# Altium PCB 3Phase+Driver_STUDY.PcbDoc
Units mil, origin at the board's own origin, x right, y up, seen from the top; angles counter-clockwise.
Board outline 3275 x 1235 mil, 2 copper layers (Top Layer, Bottom Layer); 85 components, 49 nets, 241 pads, 28 vias.
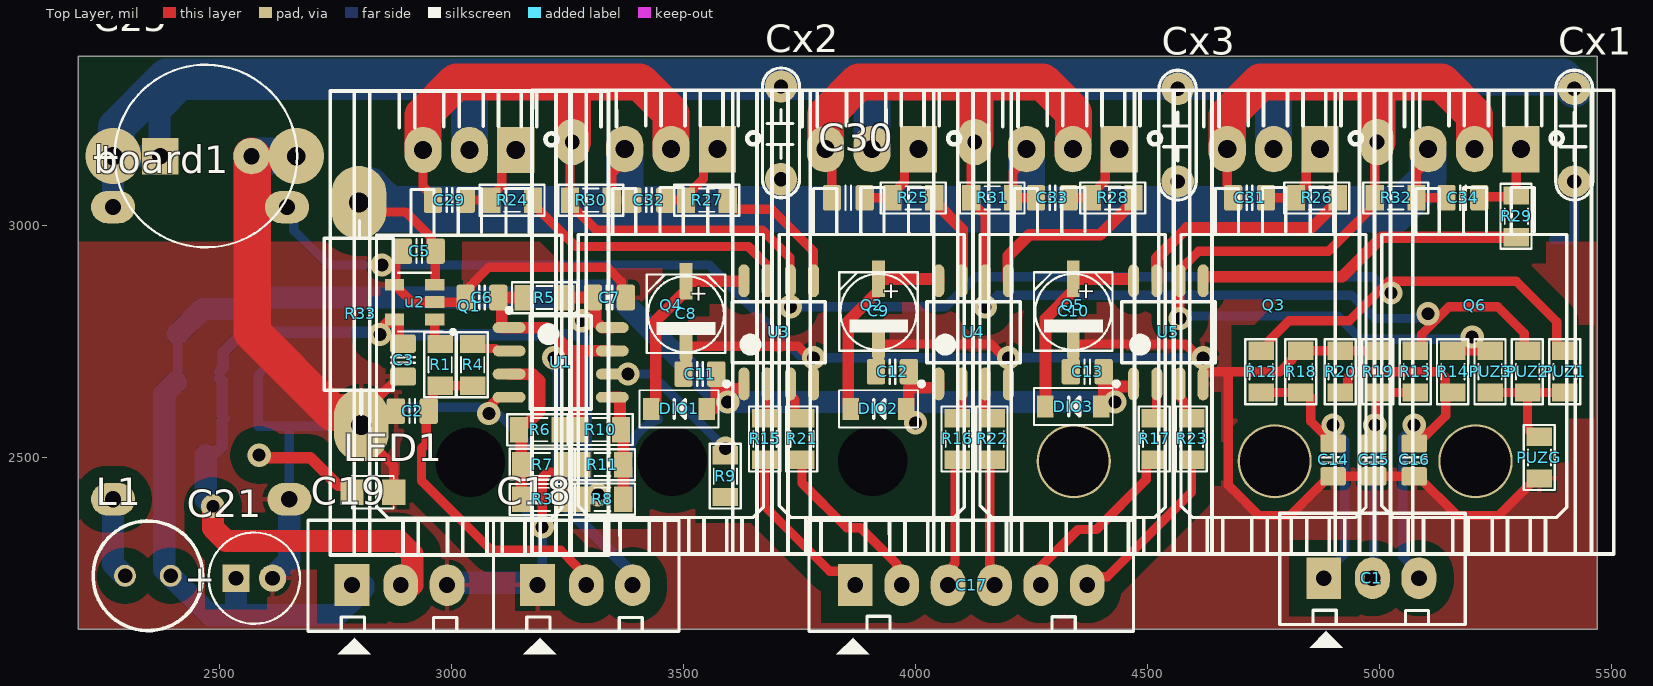
[diagram p0: Top Layer view]
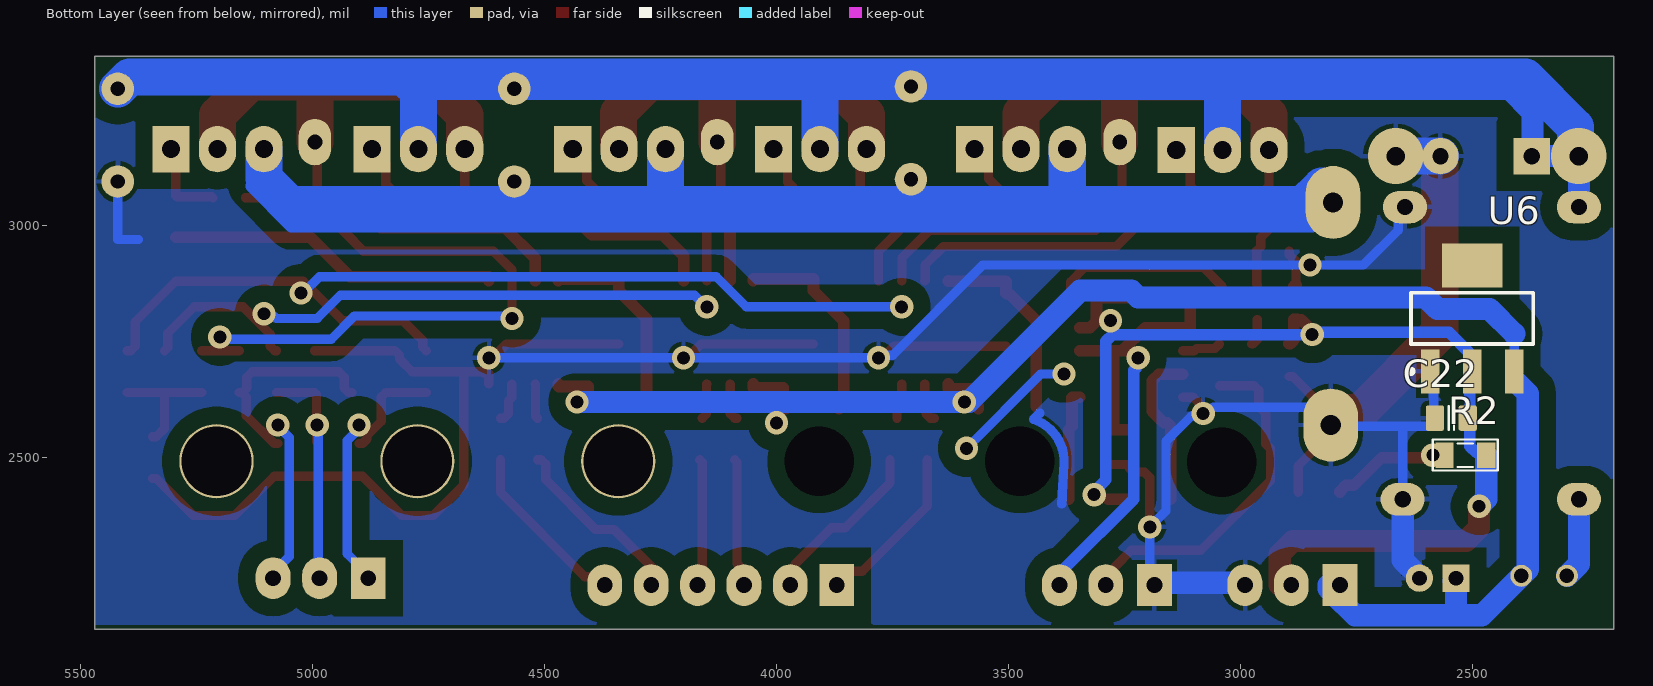
[diagram p1: Bottom Layer view, seen from below]
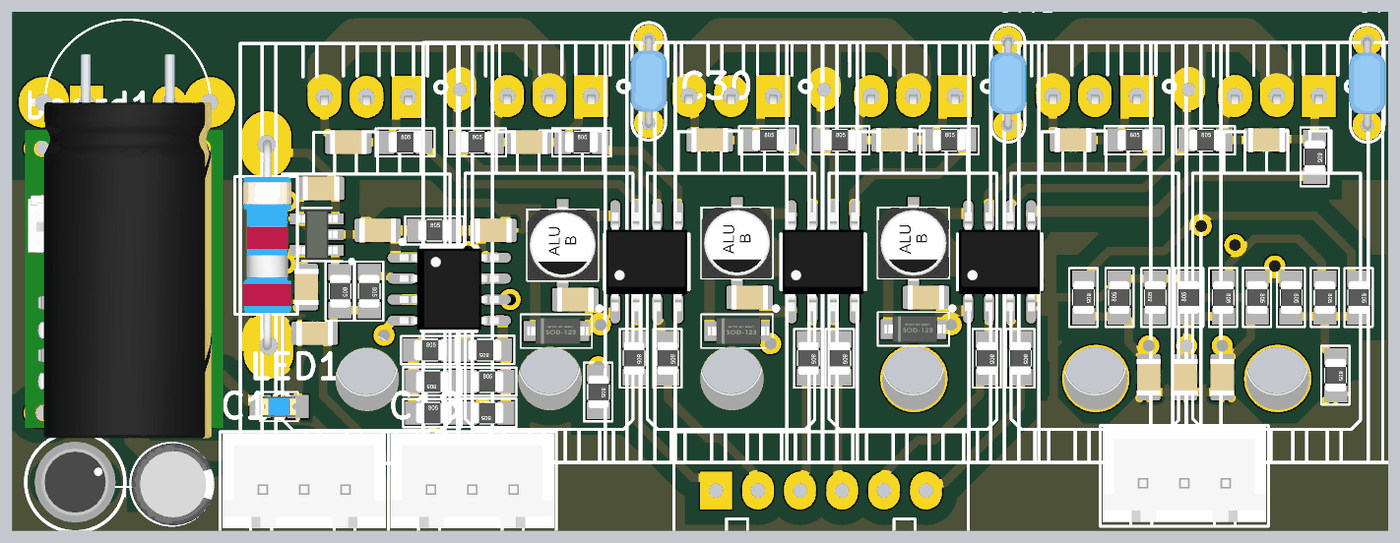
[diagram p2: 3D render of the assembled board from above, using the file's embedded part models]
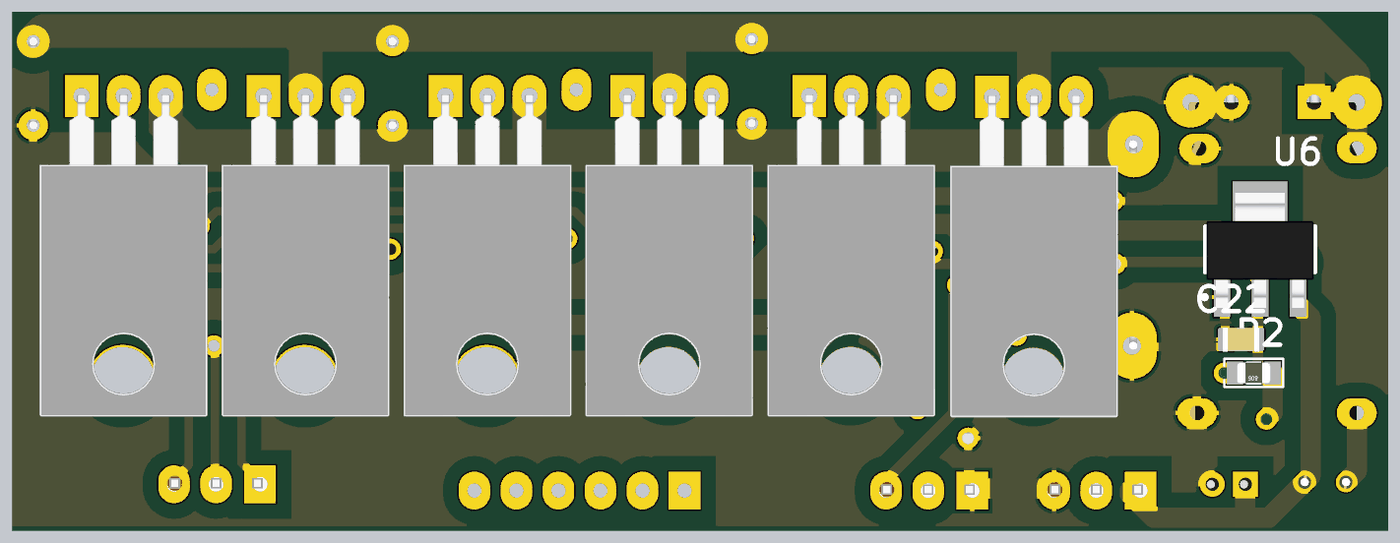
[diagram p3: 3D render of the assembled board from below, using the file's embedded part models]

## Layer stack, top to bottom
Top Solder: solder mask 0.4, Solder Resist, Dk 3.5
Top Layer: signal copper 1.4
Dielectric 1: dielectric 12.6, FR-4, Dk 4.8
Bottom Layer: signal copper 1.4
Bottom Solder: solder mask 0.4, Solder Resist, Dk 3.5

## Board outline
2195,2130 2195,3365 5470,3365 5470,2130

## Design rules (kind name [scope] priority, off if disabled: settings)
Clearance [All] p1: gap=10 ignorepadtopadclearanceinfootprint=FALSE except(0: Arc-Hole Track-Hole SMDPad-Hole THPad-Hole Via-Hole Fill-Hole Poly-Hole Region-Hole Text-Hole; 37: Arc-Fill Arc-Poly Arc-Region Track-Fill Track-Poly Track-Region SMDPad-Fill SMDPad-Poly SMDPad-Region THPad-Fill THPad-Poly THPad-Region Via-Fill Via-Poly Via-Region Fill-Fill Fill-Poly Fill-Region Poly-Poly Poly-Region Region-Region)
PolygonConnect [All] p1: connectstyle=Relief reliefconductorwidth=10 reliefentries=4 polygonreliefangle="90 Angle" airgapwidth=10
RoutingVias [All] p1: holewidth=28 width=50 viastyle="Through Hole" minholewidth=28 minwidth=50 maxholewidth=28 maxwidth=50
SolderMaskExpansion [All] p1: expansion=4 istentingtop=FALSE
Width [All] p1: maxlimit=80 minlimit=20 preferedwidth=48
30 further rules are at their usual default settings.

## Components (designator, comment, footprint, x,y, rotation, side; value= is the part's Value field where it differs from the comment)
board1 "Converter DC-DC" mini360 2225,3083 r270 top
C1 "Header3" Header3 4885,2240 r0 top
C2 "approved sub OK" CAPC2012X135N 2915,2600 r180 top value=0805
C3 "approved sub OK" CAPC2012X135N 2895,2710 r90 top value=0805
C5 "approved sub OK" CAPC2012X135N 2930,2945 r0 top value=0805
C6 "approved sub OK" CAPC2012X135N 3065,2845 r0 top value=0805
C7 "approved sub OK" CAPC2012X135N 3340,2845 r180 top value=0805
C8 "CN-ALU-SMD" CAP-ALU-SMD-5.5x5.5 3505,2810 r270 top
C9 "CN-ALU-SMD" CAP-ALU-SMD-5.5x5.5 3920,2815 r270 top
C10 "CN-ALU-SMD" CAP-ALU-SMD-5.5x5.5 4340,2815 r270 top
C11 "approved sub OK" CAPC2012X135N 3535,2680 r0 top value=0805
C12 "approved sub OK" CAPC2012X135N 3950,2685 r0 top value=0805
C13 "approved sub OK" CAPC2012X135N 4370,2685 r0 top value=0805
C14 "approved sub OK" CAPC2012X135N 4900,2495 r270 top value=0805
C15 "approved sub OK" CAPC2012X135N 4987.5,2495 r270 top value=0805
C16 "approved sub OK" CAPC2012X135N 5075,2495 r270 top value=0805
C17 "Header6" Header6 3870,2225 r0 top
C18 "Header3" Header3 3190,2225 r0 top
C19 "Header3" Header3 2790,2225 r0 top
C21 "d5" CA-ALU-5 2574.37,2240 r0 top value=104
C22 "approved sub OK" CAPC2012X135N 2545,2585 r180 bottom value=0805
C25 "CN-10" CA-ALU-10 2470,3150 r0 top value=104
C29 "approved sub OK" CAPC2012X135N 2995,3055 r180 top value=0805
C30 "approved sub OK" CAPC2012X135N 3855,3060 r180 top value=0805
C31 "approved sub OK" CAPC2012X135N 4720,3060 r180 top value=0805
C32 "approved sub OK" CAPC2012X135N 3425,3055 r180 top value=0805
C33 "approved sub OK" CAPC2012X135N 4295,3060 r180 top value=0805
C34 "approved sub OK" CAPC2012X135N 5180,3060 r180 top value=0805
Cx1 "U" CN2-LT 5415,3195 r90 top value=33pF
Cx2 "V" CN2-LT 3705,3200 r90 top value=33pF
Cx3 "W" CN2-LT 4560,3195 r90 top value=33pF
DIO1 "Diode SMD" DIO-SMD-123 3490,2605 r0 top value=1N5007
DIO2 "Diode SMD" DIO-SMD-123 3920,2605 r0 top value=1N5007
DIO3 "Diode SMD" DIO-SMD-123 4340,2610 r0 top value=1N5007
L1 "L-DIP-1" L-DIP-M-5.3 2345,2245 r0 top value="150 mH"
LED1 "bl" LED-0805-Blue 2785,2425 r0 top value="LED 3 - 5 ly 2 Colour"
PUZ1 "0805" RES-SMD-0805 5400,2685 r270 top
PUZ2 "0805" RES-SMD-0805 5319.38,2685 r270 top
PUZ3 "0805" RES-SMD-0805 5238.75,2685 r270 top
PUZG "0805" RES-SMD-0805 5345,2500 r270 top
Q1 "dow" TO220NH#1 3138,3163 r180 top locked value=IRF840
Q2 "dow" TO220NH#2 4006,3165 r180 top locked value=IRF840
Q3 "dow" TO220NH#3 4872,3165 r180 top locked value=IRF840
Q4 "dow" TO220NH#2 3573,3165 r180 top locked value=IRF840
Q5 "dow" TO220NH#3 4439,3165 r180 top locked value=IRF840
Q6 "dow" TO220NH#3 5305,3165 r180 top locked value=IRF840
R1 "10" RES-SMD-0805 2975,2700 r270 top
R2 "0805" RES-SMD-0805 2515,2505 r0 bottom
R3 "0805" RES-SMD-0805 3195,2410 r0 top
R4 "0805" RES-SMD-0805 3045,2700 r270 top
R5 "0805" RES-SMD-0805 3200,2845 r0 top
R6 "0805" RES-SMD-0805 3190,2560 r0 top
R7 "0805" RES-SMD-0805 3195,2485 r180 top
R8 "0805" RES-SMD-0805 3325,2410 r180 top
R9 "0805" RES-SMD-0805 3590,2460 r270 top
R10 "0805" RES-SMD-0805 3320,2560 r180 top
R11 "0805" RES-SMD-0805 3325,2485 r0 top
R12 "0805" RES-SMD-0805 4745,2685 r270 top
R13 "0805" RES-SMD-0805 5077.5,2685 r270 top
R14 "0805" RES-SMD-0805 5158.12,2685 r270 top
R15 "0805" RES-SMD-0805 3675,2540 r270 top
R16 "0805" RES-SMD-0805 4090,2540 r270 top
R17 "0805" RES-SMD-0805 4515,2540 r270 top
R18 "0805" RES-SMD-0805 4830,2685 r90 top
R19 "0805" RES-SMD-0805 4995.88,2685 r90 top
R20 "0805" RES-SMD-0805 4915.25,2685 r90 top
R21 "0805" RES-SMD-0805 3755,2540 r270 top
R22 "0805" RES-SMD-0805 4165,2540 r270 top
R23 "0805" RES-SMD-0805 4595,2540 r270 top
R24 "0805" RES-SMD-0805 3130,3055 r0 top
R25 "0805" RES-SMD-0805 3995,3060 r0 top
R26 "0805" RES-SMD-0805 4865,3060 r0 top
R27 "0805" RES-SMD-0805 3550,3055 r0 top
R28 "0805" RES-SMD-0805 4425,3060 r0 top
R29 "0805" RES-SMD-0805 5295,3020 r270 top
R30 "0805" RES-SMD-0805 3300,3055 r0 top
R31 "0805" RES-SMD-0805 4165,3060 r0 top
R32 "0805" RES-SMD-0805 5035,3060 r0 top
R33 "1/2" RES-1/2W 2800,2790 r90 top
U1 "LM393" SO8 3235,2705 r0 top
u2 "INA180" SOT-23-5 2920,2835 r180 top
U3 "IR2101" SO8 3705,2770 r90 top
U4 "IR2101" SO8 4125,2770 r90 top
U5 "IR2101" SO8 4545,2770 r90 top
U6 "LM1117-3.3V" SOT223 2500,2800 r180 bottom

## Footprints (in the part's own frame and the unit in brackets; to place one, negate y for a bottom-side part, rotate by r counter-clockwise, add the part's x,y. Pads: shape width x height; smd on the part's side, far side on the other; paste and mask are expansions set on the pad)
CA-ALU-5 [mm] "Polarized capacitors, Aluminum Electrolytic Capacitors, 2-Leads, Body 5x11x2x0.5"
  rect 1.5x1.5 hole 0.8: 1(-1,0)
  round 1.5 hole 0.8: 2(1,0)
  silkscreen extent -2.5,-2.5 2.5,2.5, body extent -2.41,-2.5 2.59,2.5, height 11
CA-ALU-10 [mm] "Polarized capacitors, Aluminum Electrolytic Capacitors, 2-Leads, Body 10x20x5x0.6"
  rect 2x2 hole 0.9: 1(-2.5,0)
  round 2 hole 0.9: 2(2.5,0)
  silkscreen extent -5,-5 5,5, body extent -5.08,-20.32 5.08,2.9, height 14.86
CAP-ALU-SMD-5.5x5.5 [mm]
  rect 2x0.7 smd: 1(-1.778,0)
  oval 2x0.7 smd: 2(1.778,0)
  silkscreen extent -2.15,-2.15 2.15,2.15, body extent -2.3,-2.15 2.3,2.15, height 5.4
CAPC2012X135N [mm] "Chip Capacitor, Body 2.0x1.2mm, EIA 0805, IPC Medium Density"
  round 0.254 on Mech15: 0(0,0)
  rrect25% 1x1.4 smd: 1(-0.9,0) 2(0.9,0)
  Top Layer pour cut-out: -0.675,0.7 -0.475,0.9 0.475,0.9 0.675,0.7 0.675,-0.7 0.475,-0.9 -0.475,-0.9 -0.675,-0.7
  silkscreen extent -0.15,-0.65 0.15,0.65, body extent -1.1,-0.72 1.1,0.73, height 1.34
CN2-LT [mil]
  round 70 hole 31: 1(-100,-5) 2(100,-5)
  silkscreen extent -140,-45 140,35, body extent -110,-48 110,39, height 276
DIO-SMD-123 [mm]
  rect 0.9x1.2 smd: 1(1.524,0) 2(-1.524,0)
  silkscreen extent -2.16,-1.02 2.16,1.02, body extent -1.76,-0.8 1.94,0.8, height 1.25
Header3 [mil] "CON 3"
  rect 75x90 hole 34: 1(-5,0)
  oval 75x90 hole 34: 2(100,0) 3(200,0)
  silkscreen extent -100,-150 300,140, body extent -95,-90 295,136, height 276
Header6 [mil] "CON6"
  rect 75x90 hole 34: 1(0,0)
  oval 75x90 hole 34: 2(100,0) 3(200,0) 4(300,0) 5(400,0) 6(500,0)
  silkscreen extent -100,-150 600,140
L-DIP-M-5.3 [mm] "THT Inductor, 2-Leads, Body 5.3  mm"
  round 1.2 hole 0.8: 1(-1.25,0) 2(1.25,0)
  silkscreen extent -3,-3 3,3, body extent -2.46,-2.44 2.44,2.45, height 7.49
LED-0805-Blue [mil]
  rect 50x55 smd: 1(0,0) 2(90,0)
  silkscreen extent 0,-35 90,35, body extent 5,-25 85,25, height 43
mini360 [mil] "power 3A"
  oval 70x95 hole 35: 1(43,420) 2(43,45) 3(673,425) 4(673,45)
  body extent 0,0 712,472, height 178
RES-1/2W [mm]
  oval 4x3 hole 1.1: 1(-5.588,-0.127) 2(6.604,0)
  silkscreen extent -4.95,-1.87 5.61,1.91, body extent -5.84,-1.52 6.86,1.43, height 4.08
RES-SMD-0805 [mil]
  rect 39.37x55 smd: 1(-45,0) 2(45,0)
  silkscreen extent -70,-34 70,33, body extent -39,-25 39,25, height 31
SO8 [mm] "SOIC, 8-Leads, Body 4.9x3.9mm, Pitch 1.27mm, IPC High Density"
  oval 1.8x0.6 smd: 1(-2.825,1.905) 2(-2.825,0.635) 3(-2.825,-0.635) 4(-2.825,-1.905) 5(2.825,-1.905) 6(2.825,-0.635) 7(2.825,0.635) 8(2.825,1.905)
  silkscreen extent -2.95,-2.55 1.68,2.98, body extent -2.99,-2.45 3,2.45, height 1.6
SOT223 [mm]
  rect 1x2.4 smd: 1(-2.3,-2.9) 2(0,-2.9) 3(2.3,-2.9)
  rect 3.3x2.4 smd: 4(0,2.9)
  silkscreen extent -3.48,-3.02 3.35,1.4, body extent -3.25,-3.56 3.25,3.4, height 1.68
SOT-23-5 [mm]
  rect 1.06x0.65 smd: 1(-1.1,0.95) 2(-1.1,0) 3(-1.1,-0.95) 4(1.1,-0.95) 5(1.1,0.95)
  silkscreen extent -2.19,-1.61 0.9,1.72, body extent -1.25,-1.5 1.25,1.5, height 1.1
TO220NH#1 [mil] "TO-220 - 1-2-3"
  rect 80x100 hole 39: 1(0,0)
  oval 80x100 hole 39: 2(100,0) 3(200,0)
  round 0 hole 150: vcc(98,673)
  silkscreen extent -200,-127 400,873, body extent -100,-4 300,764
TO220NH#2 [mil] "TO-220 - 1-2-3"
  rect 80x100 hole 39: 1(0,0)
  oval 80x100 hole 39: 2(100,0) 3(200,0)
  round 0 hole 150: H(98,673)
  silkscreen extent -200,-127 400,873, body extent -100,-4 300,764
TO220NH#3 [mil] "TO-220 - 1-2-3"
  rect 80x100 hole 39: 1(0,0)
  oval 80x100 hole 39: 2(100,0) 3(200,0)
  round 160 hole 150: H(98,673)
  silkscreen extent -200,-127 400,873, body extent -100,-4 300,764

## Part data
board1: "Step DC-DC"
C1 C18 C19: "Header IDC, 3 x 1 Pin Vertical 2.54mm Pitch (Non-Boxed, Male)", Manufacturer="W¨¹rth Elektronik eiSos GmbH", partNo=613002143121, ComponentLink1 Description=Manufacturer, ComponentLink1URL=http://www.we-online.com, ComponentLink2 Description=Datasheet, ComponentLink2URL=http://katalog.we-online.de/em/datasheet/6130xx143121.pdf, Created by="Karrer Zheng", Created Date="29 March 2013", NoPins=02
C2 C3 C5 C6 C7 C11 C12 C13 C14 C15 C16 C22 C29 C30 C31 C32 C33 C34: library part "CAP C_0805", "Capacitor SMD Cer 1.8nF 10% 50V X7R 0805", Manufacturer 1="AVX Corporation", Manufacturer Part Number 1=08055C182KAT2A, Operating Temperature="-55°C ~ 125°C", Package / Case="0805 (2012 metric)", Ratings="50V; X7R", Supplier Part Number 1=478-1374-1-ND, Tolerance=±10%, SCDType=source*, Supplier 1=Digi-Key
C8 C9 C10: "Polarized Capacitor (Axial)", LatestRevisionDate=17-Jul-2002, LatestRevisionNote="Re-released for DXP Platform.", PackageReference=POLAR0.8, Published=8-Jun-2000, Publisher="Altium Limited"
C17: "Header IDC, 6 x 1 Pin Vertical 2.54mm Pitch (Non-Boxed, Male)", Manufacturer="W¨¹rth Elektronik eiSos GmbH", partNo=613002143121, ComponentLink1 Description=Manufacturer, ComponentLink1URL=http://www.we-online.com, ComponentLink2 Description=Datasheet, ComponentLink2URL=http://katalog.we-online.de/em/datasheet/6130xx143121.pdf, Created by="Karrer Zheng", Created Date="29 March 2013", NoPins=02
C21 C25: library part CN-ALU-DIP, "Capacitor (Semiconductor SIM Model)", LatestRevisionDate=17-Jul-2002, LatestRevisionNote="Re-released for DXP Platform.", PackageReference=C1206, Publisher="Altium Limited"
Cx1 Cx2 Cx3: library part CN
DIO1 DIO2 DIO3: "Default Diode", Code - JEDEC=DO-214-AB, Published=8-Jun-2000, Publisher="Altium Limited", Revision="July-2002: Re-released for DXP Platform."
L1: "Inductor"
LED1: library part "LED SMD"
PUZ1 PUZ2 PUZ3 PUZG R1 R2 R3 R4 R5 R6 R7 R8 R9 R10 R11 R12 R13 R14 R15 R16 R17 R18 R19 R20 R21 R22 R23 R24 R25 R26 R27 R28 R29 R30 R31 R32: library part Res-SMD, "Resistor", Manufacturer="Generic Components", Class=Passive, Published=08/06/2000, Publisher="Altium Hobart Technology Centre"
Q1 Q2 Q3 Q4 Q5 Q6: library part IRF840, "MOSFET N - CHANNEL 500V - 0.75 - 8A - TO-220"
R33: library part Res, "Res", Manufacturer="Generic Components", Class=Passive, Published=08/06/2000, Publisher="Altium Hobart Technology Centre", SubClass=R
U1: "IC DUAL COMPARATOR"
u2: library part SOT-23-5_SMD, "SMD_IC_SOT-23-5"
U3 U4 U5: library part IR2101S, "Half-Bridge Driver"
U6: library part LM1117, "800mA Low-Dropout Linear Regulator", Creator="Nguyen Ba Bien", Website=http://group3i.net

## Free pads (board coordinates)
  oval 70x100 hole 32: 4(3260,3180) 4(4127.5,3180) 4(4995,3180)

## Via types
v1: diameter 50, hole 28, Top Layer to Bottom Layer, 26 vias
v2: diameter 120, hole 40, Top Layer to Bottom Layer, 2 vias

## Nets (pads, with @x,y where several pads share a name; then routed paths per layer and width w, separated by ;. In a path a pad name is that pad's centre, name@x,y a point inside that pad or via, vN(x,y) a via of type N, cw(c..) or ccw(c..) an arc to the next point about the centre after c; other vN are vias at no path point)
+3V3: C3.2 C7.2 C19.2 C22.2 R2.1 R3.2 R5.2 R8.2 U1.8 u2.5 U6.2 | length 2392.9
  Top Layer w25: v1(2845,2765) 2849.78,2769.78 2849.78,2778.76 2868.33,2797.3 2876.4,2797.3 u2.5 2884.77,2797.6 2885.06,2797.3 2885.06,2752.62 2892.25,2745.43 C3.2 ; R3.2 R8.2 R8.2@3285,2410 ; R5.2 3250,2850 3250,2847.18 3252.18,2845 C7.2 3310,2839.57 3310,2793.98 3323.98,2780 U1.8
  Top Layer w48: v1(2485,2395) 2485.38,2394.62 2485.38,2348.12 2513.5,2320 2886.88,2320 2915,2291.88 C19.2@2915,2225
  Bottom Layer w25: R2.1@2480,2490 R2.1@2480,2497.81 ; R2.1@2480,2502.81 2487.18,2510 2490.36,2510 2505,2524.64 2505,2580.43 C22.2 2505,2589.57 2505,2665.83 U6.2@2500,2670.83 ; U6.2 2507.19,2693.01 2507.19,2727.19 2550,2770 2833.24,2770 2838.24,2765 v1(2845,2765) 3275.36,2765 3290,2750.36 3290,2451.76 3315,2426.76 v1(3315,2420)
  Bottom Layer w48: R2.1 2470,2410.54 2485,2395.54 v1(2485,2395)
  other v1: 3280,2795
+12: C11.2 C12.2 C13.2 C19.1 C21.1 DIO1.1 DIO2.1 DIO3.1 L1.2 U3.1 U4.1 U5.1 U6.3 | length 3594.7
  Top Layer w25: DIO1.1@3565,2605 3565,2610.91 3570.43,2616.34 3570.43,2648.17 3629.31,2648.17 3630,2648.86 U3.1 ; DIO2.1 3980,2610.91 3985.43,2616.34 3985.43,2650.67 4049.31,2650.67 4050,2651.36 U4.1 ; DIO3.1 4400,2615.91 4405.43,2621.34 4405.43,2653.17 4469.31,2653.17 4470,2653.86 U5.1
  Bottom Layer w20: U6.3 2409.45,2766.9
  Bottom Layer w48: U6.3@2405.13,2662.58 2380,2637.45 2380,2259.21 L1.2 2479.21,2160 2535,2160 ; 2409.45,2766.9 2462.55,2820 2575,2820 2600,2845 3220,2845 3235,2860 3345,2860 3584.62,2620.38 3594.62,2620.38 v1(3595,2620) ; C21.1@2540.53,2234.47 C21.1 2535,2160 ; C19.1@2810,2225 2810,2217.5 2796.5,2204 2752.5,2160 2535,2160 ; v1@3594.46,2620 v1(4430,2620)
  other v1: 4000,2575
AMPE1: C5.2 C32.2 C33.2 C34.2 Cx2.1 Cx3.1 Q4.3 Q5.3 Q6.3 R30.2 R31.2 R32.2 R33.2 u2.3 | length 5869.3
  Top Layer w20: R33.2 2820.75,3029.25 2900.75,3029.25 2955.75,2974.25 2955.75,2954.69 C5.2 2964.37,2943.94 2964.37,2873.46 u2.3 ; Q4.3 3373,3140.5 3345,3112.5 R30.2 C32.2 ; Q5.3 4239,3144.57 4210,3115.57 R31.2 C33.2 ; Q6.3 5105,3140.57 5080,3115.57 R32.2 C34.2
  Bottom Layer w30: R33.2@2800,3045 2845,3000 5045,3000 5130,3085 ; R33.2@2800,3055 2800,3062.6 R33.2@2800,3072.6
  Bottom Layer w80: R33.2@2800,3062.6 2822.4,3085 2825,3085 2865,3045 3365,3045 ; Q4.3 3373,3053 3365,3045 ; Q5.3 4239,3046 4240,3045 ; Q6.3 5105,3101.86 5048.14,3045 4240,3045 ; 3365,3045 4240,3045
AMPE-IN: C2.1 C18.2 R1.2 R4.2 | length 706.6
  Top Layer w20: R4.2 R1.2 2969.8,2655 2960.12,2645.32 2960.12,2609.69 2945,2594.57 2945,2529.35 2935,2519.35 2935,2450 3085,2300 3235,2300 3270.22,2264.78
BEMF-U: C1.1 C14.1 R12.2 R18.1 | length 584.5
  Top Layer w20: R12.2@4755,2640 4834.62,2640 4842.44,2640 4852.12,2630.31 4852.12,2578.31 4882.44,2547.99 4882.44,2540.12 4892.13,2530.43 C14.1
  Bottom Layer w20: C1.1 4880,2247.5 4925,2292.5 4925,2536.88 4900,2561.88 v1(4900,2570)
BEMF-V: C1.2 C15.1 R13.2 R19.1 | length 526.7
  Top Layer w20: C15.1 4991.69,2534.62 4991.69,2635.81 R19.1 R13.2
  Bottom Layer w20: C1.2 4987.5,2242.5 4987.5,2567.5 v1(4990,2570)
BEMF-W: C1.3 C16.1 R14.2 R20.1 | length 808.9
  Top Layer w20: R20.1 4921.89,2640 4931.58,2649.68 4931.58,2673.28 4943.29,2685 5130.08,2685 5141.8,2673.28 5141.8,2649.69 5151.48,2640 R14.2@5152.44,2640 ; C16.1 5082.87,2530.43 5142.76,2590.32 5142.76,2630.32 R14.2@5152.44,2640 ; R14.2 R14.2@5152.44,2640
  Bottom Layer w20: v1(5075,2570) 5075,2568.28 5050,2543.28 5050,2286.72 5085,2251.72 C1.3
E-STOP: R9.2
GND: board1.1 board1.3 C2.2 C3.1 C5.1 C6.1 C7.1 C8.2 C9.2 C10.2 C11.1 C12.1 C13.1 C14.2 C15.2 C16.2 C18.1 C19.3 C21.2 C22.1 C25.2 Cx1.1 LED1.2 PUZG.2 R7.1 R11.1 R18.2 R19.2 R20.2 R33.1 U1.4 u2.2 u2.4 U3.4 U4.4 U5.4 U6.1 | length 8540.7
  Top Layer w20: R33.1 2805,2552.5 2875,2482.5 LED1.2 ; R33.1@2805,2589.69 2805,2592.44 2887.13,2674.57 C3.1 ; C5.1 2894.57,2937.13 2880,2922.56 2880,2875.19 2877.2,2872.4 2884.77,2872.4 2887.56,2869.6 2887.56,2862.04 2914.6,2835 u2.2 C6.1@3019.88,2835 ; C6.1 3039.25,2854.69 3039.25,2869.25 3080,2910 3335,2910 3365.75,2879.25 3365.75,2854.69 C7.1 ; v1(3080,2595) 3085.74,2600.74 3085.74,2614.6 3101.14,2630 U1.4 ; v1(3195,2350) 3195,2456.96 3206.72,2468.67 3230.31,2468.67 3240,2478.36 R7.1 R11.1 ; C8.2 3746.88,2740 3771.88,2715 v1(3780,2715) ; C9.2 4161.88,2745 4191.88,2715 v1(4200,2715) ; C10.2 4581.88,2745 4611.88,2715 v1(4620,2715) ; U5.4 4620,2681.42 4621.67,2683.09 4631.62,2683.09 4633.53,2685 4675,2685 ; R18.2 4822.19,2730 4812.5,2720.31 4812.5,2712.5 4785,2685 4675,2685 ; R18.2@4834.62,2730 R20.2 R19.2 ; PUZG.2 5337.19,2455 5257.18,2375 5167.44,2375 5082.87,2459.57 C16.2 C15.2 C14.2 4892.13,2459.57 4807.56,2375 4740,2375 4674,2441 4674,2684 4675,2685
  Top Layer w80: C25.2 2570,3148.43 2570,2770 2743.02,2596.98 2787.4,2596.98 R33.1@2805,2579.37 ; R33.1 R33.1@2805,2579.37 ; R33.1@2805,2589.69 R33.1@2805,2579.37
  Bottom Layer w20: U6.1 2582.93,2678.21 2582.93,2567.5 2650,2567.5 ; board1.1 2659.71,3025.29 2659.71,2990.29 2735,2915 v1(2850,2915) 3555,2915 3749.26,2720.74 3774.26,2720.74 v1(3780,2715) v1(4200,2715) v1(4620,2715) ; board1.3 2650,2567.5 ; v1@3076.54,2598.46 3085.74,2589.26 3105.74,2589.26 3160,2535 3160,2385 v1(3195,2350) 3195,2235 3190,2230 C18.1 ; v1(3080,2595) 3071.88,2595 3058.42,2608.46 2843.46,2608.46 R33.1 2802.5,2567.5 2650,2567.5 ; 3385,2400 3384.01,2417.6 3383.79,2421.53 3380.15,2486.69 cw(c3475,2492) 3446,2582.47 3432.01,2595.79 ; 5375,2970 5420,2970 Cx1.1
  Bottom Layer w48: C21.2 2613.74,2242.99 2650,2279.25 board1.3 ; C19.3 2995,2230 C18.1@3190,2230
  Bottom Layer w80: C25.2 v2(2665,3150)
HIU: C17.1 R15.2 | length 366.9
  Top Layer w20: R15.2 3675,2395 3815.04,2254.96 3842.5,2254.96 3870,2227.46 C17.1
HIV: C17.3 R16.2 | length 278.3
  Top Layer w20: C17.3 4080.52,2235.52 4080.52,2267.24 4085,2271.72 4085,2490 R16.2
HIW: C17.5 R17.2 | length 397.8
  Top Layer w20: C17.5@4250,2245 4350,2345 4390,2345 4497.5,2452.5 4497.5,2485.32 4507.19,2495 R17.2 ; C17.5 C17.5@4270,2235
HU: R24.2 U3.7 | length 601.3
  Top Layer w20: R24.2 3175,3047.19 3267.18,2955 3640,2955 3679.31,2915.69 3679.31,2881.91 U3.7
HV: R25.2 U4.7 | length 203.6
  Top Layer w25: R25.2 4040,3052.19 4100,2992.19 U4.7
HW: R26.2 U5.7 | length 497.2
  Top Layer w25: U5.7 4520,2930 4585,2995 4852.81,2995 4910,3052.19 R26.2
LIU: C17.2 R21.2 | length 376.4
  Top Layer w20: R21.2 3755,2445.32 3851.6,2348.71 3881.29,2348.71 3959.48,2270.52 3959.48,2235.52 C17.2
LIV: C17.4 R22.2 | length 276.2
  Top Layer w20: R22.2 4160,2490 4160,2235 C17.4
LIW: C17.6 R23.2 | length 377.8
  Top Layer w20: C17.6 4388.02,2243.02 4413.02,2243.02 4595,2425 R23.2
LU: R27.2 U3.5 | length 298.9
  Top Layer w20: R27.2 3595,3047.19 3604.68,3037.5 3612.5,3037.5 3615,3035 3690,3035 3780,2945 U3.5
LV: R28.2 U4.5 | length 380.1
  Top Layer w25: U4.5 4200,2935 4245,2980 4397.81,2980 4470,3052.19 R28.2
LW: R29.2 U5.5 | length 718.6
  Top Layer w25: U5.5 4620,2889.31 4620.69,2890 4920,2890 5005,2975 R29.2
Netboard1_4: board1.4 L1.1 | length 175.7
  Bottom Layer w48: board1.4 2270,2270.79 L1.1
NetC8_1: C8.1 DIO1.2 U3.8 | length 426
  Top Layer w25: DIO1.2@3440,2610 3440,2795 3498.13,2853.13 3503.72,2853.13 3505,2854.41 C8.1 3629.31,2880 3630,2880.69 U3.8
NetC9_1: C9.1 DIO2.2 U4.8 | length 444.4
  Top Layer w25: DIO2.2@3865,2605 3855,2615 3855,2794.41 3920,2859.41 C9.1 4049.31,2885 4050,2884.31 U4.8
NetC10_1: C10.1 DIO3.2 U5.8 | length 433.2
  Top Layer w25: DIO3.2 4280,2799.41 4340,2859.41 C10.1 4469.31,2885 4470,2884.31 U5.8
NetC29_1: C29.1 Q1.1 R24.1 | length 184.5
  Top Layer w20: C29.1 R24.1 3085,3062.81 3108,3085.82 3108,3133 Q1.1
NetC30_1: C30.1 Q2.1 R25.1 | length 187.8
  Top Layer w20: C30.1 R25.1 3950,3067.81 3976,3093.81 3976,3135 Q2.1
NetC31_1: C31.1 Q3.1 R26.1 | length 191.1
  Top Layer w20: C31.1 R26.1 4820,3067.81 4842,3089.82 4842,3135 Q3.1
NetC32_1: C32.1 Q4.1 R27.1 | length 182.7
  Top Layer w20: C32.1 R27.1 3505,3062.81 3543,3100.82 3543,3135 Q4.1
NetC33_1: C33.1 Q5.1 R28.1 | length 179
  Top Layer w20: C33.1 R28.1 4380,3067.81 4409,3096.82 4409,3135 Q5.1
NetC34_1: C34.1 Q6.1 R29.1 | length 185.8
  Top Layer w20: C34.1 5217.93,3062.5 5292.5,3062.5 R29.1 5295,3155 Q6.1
NetLED1_1: LED1.1 R2.2 | length 257.5
  Top Layer w25: v1@2585,2500 2695,2500 2755,2440 2772.5,2440 2785,2427.5 LED1.1
  Bottom Layer w25: R2.2@2570,2505 v1(2585,2505) v1@2595,2505
NetR1_1: R1.1 u2.1 | length 58.6
  Top Layer w20: u2.1 2963.31,2754.69 2972.99,2745 R1.1
NetR3_1: R3.1 R6.1 R7.2 U1.3 | length 348.8
  Top Layer w25: U1.3 3175.36,2680 3190,2665.36 3190,2600 3165,2575 3157.18,2575 3150,2567.81 3150,2560 R7.2 R3.1
NetR4_1: R4.1 U1.2 | length 85
  Top Layer w20: R4.1 3054.69,2735.32 3093.86,2735.32 3099.18,2730 U1.2
NetR8_1: R8.1 R10.1 R11.2 U1.5 | length 239.2
  Top Layer w25: U1.5 3362.13,2630 3362.82,2629.31 3362.82,2567.19 3370,2560 R11.2 R8.1
NetR9_1: R9.1 U1.6 | length 276.3
  Bottom Layer w20: v1(3380,2680) 3430,2680 v1(3590,2520)
NetR15_1: R15.1 U3.2 | length 86.6
  Top Layer w20: R15.1@3660,2585 3667.81,2585 3677.5,2594.69 3677.5,2631.68 3680,2634.18 U3.2
NetR16_1: R16.1 U4.2 | length 82.7
  Top Layer w20: R16.1@4085,2585 4089.62,2585 4099.31,2594.69 4099.31,2658.09 U4.2
NetR17_1: R17.1 U5.2 | length 75.8
  Top Layer w20: R17.1 4519.31,2589.31 4519.31,2658.09 U5.2
NetR21_1: R21.1 U3.3 | length 77.9
  Top Layer w20: U3.3 3730,2634.18 3740,2624.18 R21.1@3740,2585
NetR22_1: R22.1 U4.3 | length 77.9
  Top Layer w20: U4.3 4150.69,2658.09 4150.69,2594.31 R22.1@4160,2585
NetR23_1: R23.1 U5.3 | length 88.7
  Top Layer w20: U5.3 4570.69,2658.09 4570.69,2629.31 4577.5,2622.5 4577.5,2594.69 4587.19,2585 R23.1
PU: C29.2 pad.4@3260,3180 PUZ1.1 Q1.3 Q4.2 R12.1 R30.1 U3.6 | length 3827.6
  Top Layer w20: Q1.3 2938,3084.27 2949.72,3072.56 2949.88,3072.56 2959.57,3062.87 C29.2 ; pad.4@3255,3165 R30.1 3255,3047.19 3264.68,3037.5 3312.18,2990 3670,2990 3729.31,2930.69 3729.31,2881.91 U3.6 ; R12.1@4755,2730 4762.5,2737.5 4762.5,2752.5 4805,2795 4935,2795 5020,2880 5295,2880 5382.5,2792.5 5382.5,2739.69 5392.19,2730 PUZ1.1
  Top Layer w80: Q1.3 2938,3238 3010,3310 3260,3310 ; pad.4@3260,3180 3260,3310 ; Q4.2 3473,3242 3405,3310 3260,3310
  Bottom Layer w20: v1(3730,2825) 4065,2825 4130,2890 4985,2890 5020,2855 v1(5025,2855)
PV: C30.2 pad.4@4127.5,3180 PUZ2.1 Q2.3 Q5.2 R13.1 R31.1 U4.6 | length 2631.4
  Top Layer w20: Q2.3 3806,3138.76 3819.57,3125.2 C30.2 ; pad.4@4120,3170 R31.1 4120,3052.19 4150,3022.18 U4.6 ; R13.1 5081.37,2730 5091.06,2739.69 5091.06,2766.06 5150,2825 5255,2825 5312.03,2767.97 5312.03,2737.35 PUZ2.1
  Top Layer w80: Q2.3 3806,3238.14 3877.86,3310 4125,3310 ; pad.4@4127.5,3180 4127.5,3307.5 4125,3310 ; Q5.2 4339,3175 4340.86,3176.86 4340.86,3243.14 4274,3310 4125,3310
  Bottom Layer w20: v1(4150,2825) 4151.72,2825 4176.72,2850 4940,2850 4990,2800 5078.28,2800 5082.54,2804.26 5099.26,2804.26 v1(5105,2810)
PW: C31.2 pad.4@4995,3180 PUZ3.1 Q3.3 Q6.2 R14.1 R32.1 U5.6 | length 2422.4
  Top Layer w20: v1(4570,2800) U5.6 4570,2904.84 4610.16,2945 4890,2945 4930,2985 4980.31,3035.31 4980.31,3050.31 R32.1 pad.4@4990,3170 ; Q3.3 4672,3080.44 4684.57,3067.87 C31.2 ; R14.1 PUZ3.1
  Top Layer w80: Q3.3 4672,3238.14 4743.86,3310 4995,3310 ; pad.4@4995,3180 4995,3310 ; Q6.2 5205,3238.14 5133.14,3310 4995,3310
  Bottom Layer w20: v1(4570,2800) 4575,2805 4910,2805 4960,2755 5195,2755 v1(5200,2760)
TIM1_BKIN: C6.2 C18.3 R5.1 R6.2 R10.2 U1.1 U1.7 | length 1156.7
  Top Layer w25: R5.1 C6.2 3107.62,2837.81 3107.62,2780.69 3108.31,2780 U1.1 3205,2780 3255,2730 ; v1(3220,2715) 3226.76,2715 3241.76,2730 3255,2730 ; R6.2@3240,2560 R10.2 3280,2560 3273.29,2566.71 3273.29,2726.71 3270,2730 ; U1.7 3270,2730 ; 3255,2730 3270,2730
  Bottom Layer w25: v1(3220,2715) 3224.78,2710.22 3224.78,2693.07 3230,2687.86 3230,2410 C18.3@3379.02,2260.98
VCC: board1.2 C25.1 Cx1.2 Cx2.2 Cx3.2 Q1.2 Q2.2 Q3.2 | length 6534.1
  Bottom Layer w48: board1.2 v2(2270,3150) C25.1 2370,3151.57 2370,3245 2420,3295 ; 2445,3320 2420,3295 ; 4800,3295 4772,3295 Cx3.2 3906,3295 3710,3295 3038,3295 2420,3295
  Bottom Layer w80: v2(2270,3150) 2277.65,3157.65 2277.65,3212.65 2385,3320 2445,3320 3050,3320 ; Q1.2 3038,3295 3038,3308 3050,3320 ; Q2.2 3906,3295 3906,3314 3900,3320 ; Q3.2 4772,3295 4772,3312 4780,3320 ; Cx1.2 5395,3320 4780,3320 ; 3050,3320 3900,3320 ; 3900,3320 4780,3320
ZF: PUZ1.2 PUZ2.2 PUZ3.2 PUZG.1 | length 271.4
  Top Layer w20: PUZ3.2 PUZ2.2 ; PUZG.1 5337.19,2545 5319.38,2562.81 PUZ2.2 ; PUZ1.2 PUZ2.2
pads on no net: C2.0 C3.0 C5.0 C6.0 C7.0 C11.0 C12.0 C13.0 C14.0 C15.0 C16.0 C22.0 C29.0 C30.0 C31.0 C32.0 C33.0 C34.0 Q1.vcc Q2.H Q3.H Q4.H Q5.H Q6.H U6.4

## Polygon pours and split planes (outlines as drawn)
GND on Top Layer "NONET_L-01_P-001" (solid, remove dead copper, pour order 1): 2195,2130 5470,2130 5470,2965 2195,2965
GND on Bottom Layer "NONET_L-01_P-001" (solid, remove dead copper, pour order 0): 2195,3365 5470,3365 5470,2140 2195,2140

## Text inside footprints (layer, text, board x,y; h text height)
C8: Top Overlay "+" at 3517.8,2872.99 h35 r270
C9: Top Overlay "+" at 3932.8,2877.99 h35 r270
C10: Top Overlay "+" at 4352.8,2877.99 h35 r270
C21: Top Overlay "+" at 2423.78,2210.98 h59.06
C25: Top Overlay "+" at 2220.98,3120.98 h59.06